# Altium PCB LEDMiniCube_PCB.PcbDoc (part 2 of 2)
Units mm, origin at the board's own origin, x right, y up, seen from the top; angles counter-clockwise.
Board outline 80 x 80 mm, 2 copper layers (Top Layer, Bottom Layer); 142 components, 145 nets, 574 pads, 515 vias.
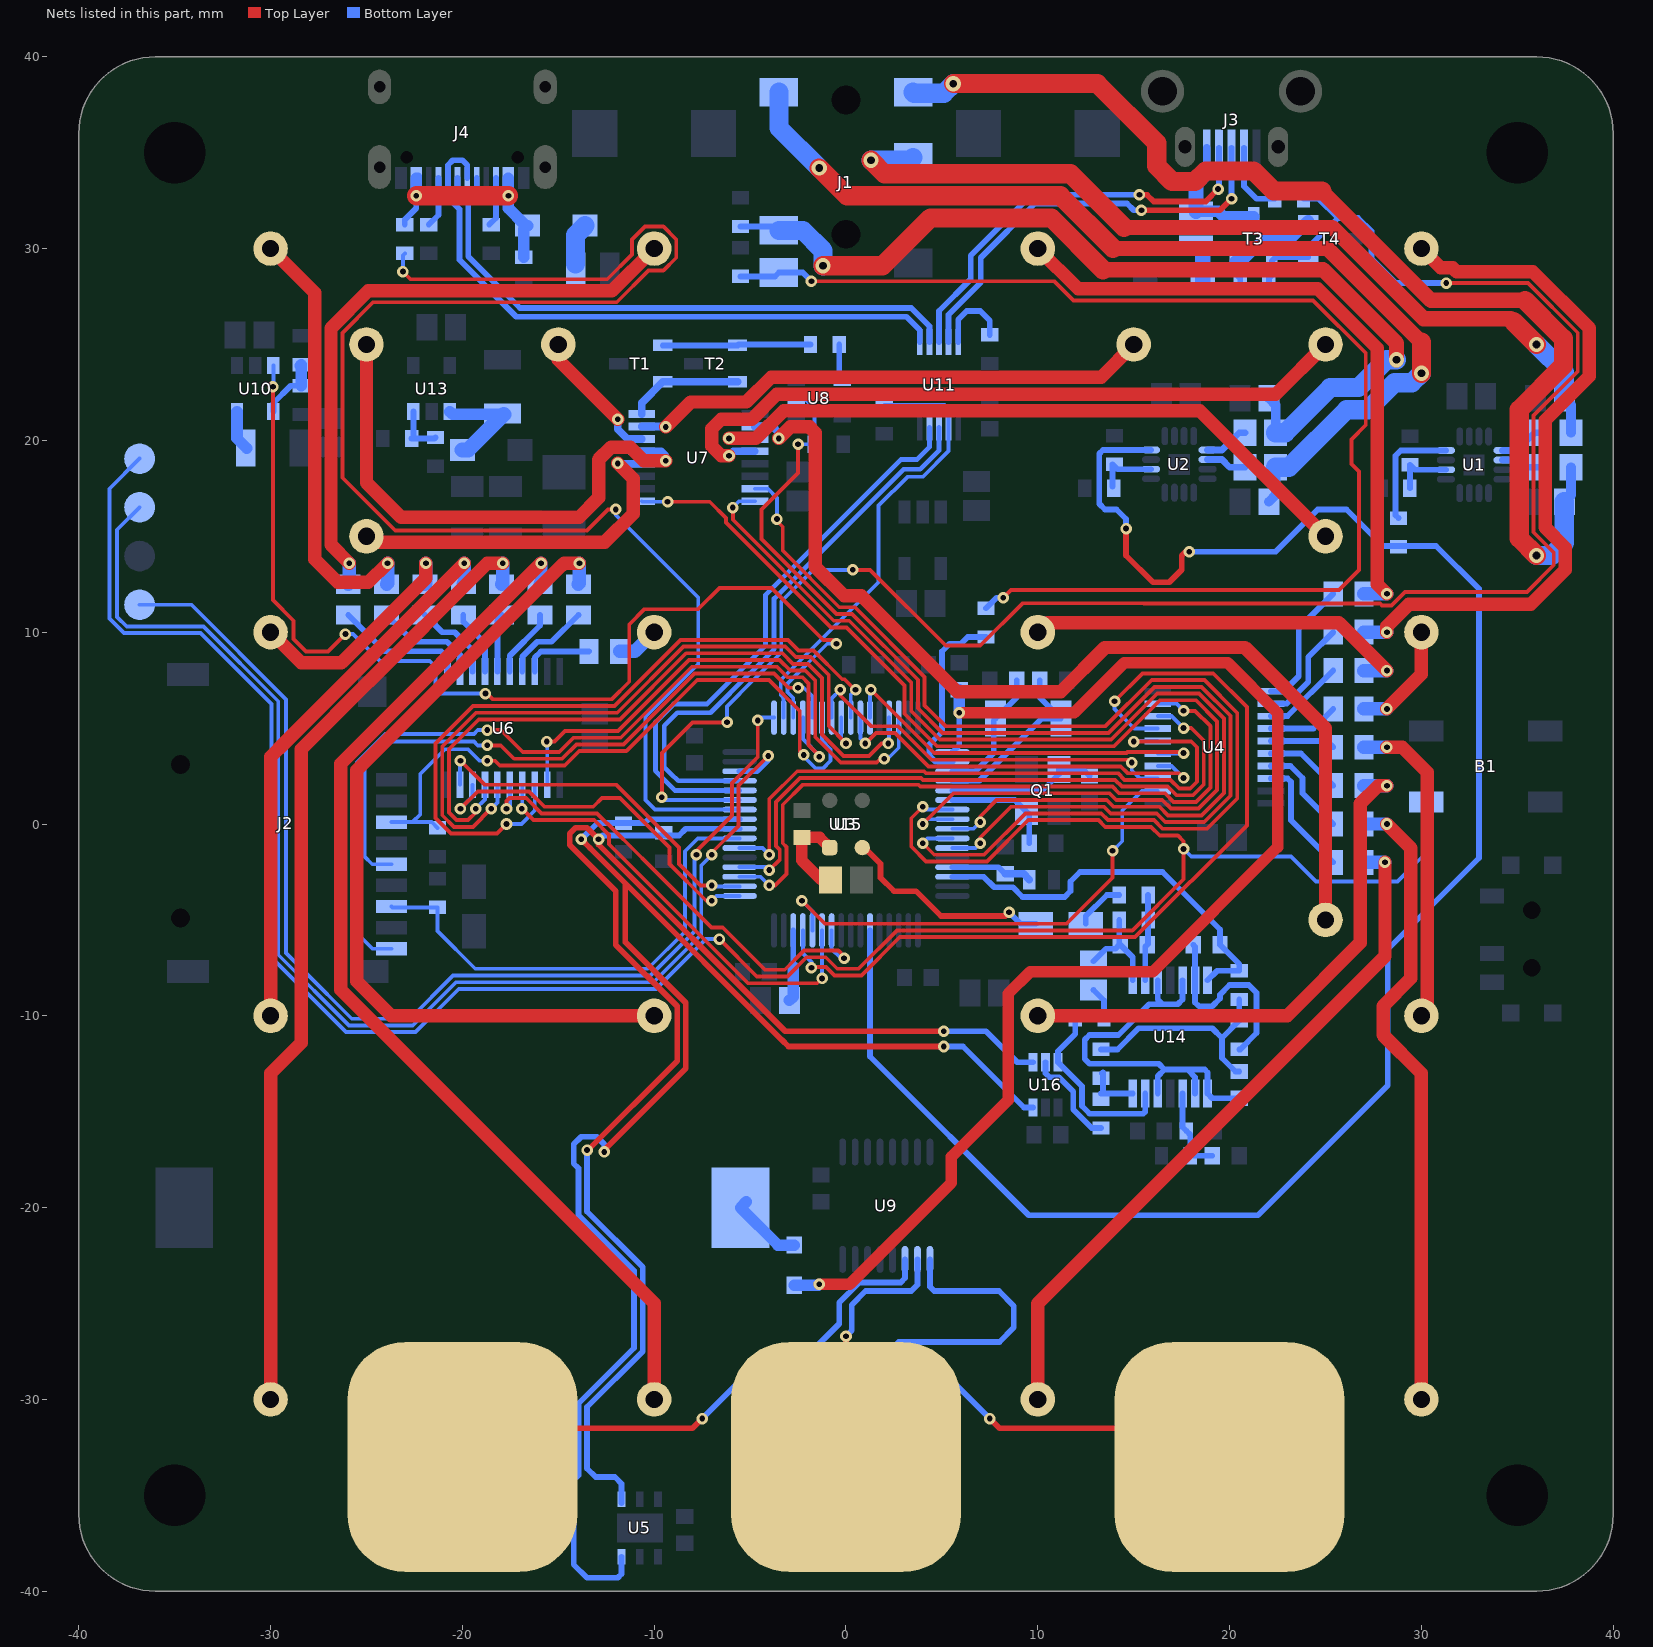
[diagram p2: the nets of this part, all layers, seen from the top]

## Via types
v1: diameter 0.6, hole 0.3, Top Layer to Bottom Layer, tented both sides, 496 vias
v2: diameter 0.8, hole 0.4, Top Layer to Bottom Layer, tented both sides, 17 vias
v3: diameter 0.6, hole 0.3, Top Layer to Bottom Layer, tented top, 2 vias

## Nets (pads, with @x,y where several pads share a name; then routed paths per layer and width w, separated by ;. In a path a pad name is that pad's centre, name@x,y a point inside that pad or via, vN(x,y) a via of type N, cw(c..) or ccw(c..) an arc to the next point about the centre after c; other vN are vias at no path point) (continued)
MAX_SD: R7.2 U2.4 U3.22 | length 99.4
  Top Layer w0.3: v1(14.6,15.4) 14.6,14 16,12.6 16.849,12.6 17.5,13.251 17.5,14 17.7,14.2 v1(17.9,14.2)
  Bottom Layer w0.3: U3.22@1.25,-5.55 1.25,-12.123 9.527,-20.4 21.473,-20.4 28.25,-13.623 28.25,-6.523 33,-1.773 33,12.264 30.764,14.5 28,14.5 26.1,16.4 24.6,16.4 22.4,14.2 v1(17.9,14.2) ; v1(14.6,15.4) 14.6,15.9 14.1,16.4 13.5,16.4 13.2,16.7 13.2,19.3 13.4,19.5 U2.4@15.9,19.5
Mic_Out: C44.2 R52.2 U3.14 U14.14 | length 20.9
  Bottom Layer w0.3: U3.14@5.55,-2.75 7.176,-2.75 7.726,-3.3 8.7,-3.3 9.2,-3.8 11.4,-3.8 11.7,-3.5 11.7,-3 12.2,-2.5 16.5,-2.5 19.5,-5.5 C44.2@19.5,-6.3 20.5,-7.3 R52.2@20.5,-7.65 19.35,-7.65 U14.14@18.85,-8.15
NetC7_1: C7.1 D1.2 U3.1 | length 67.9
  Top Layer w0.6: v1(-1.4,-24) 0.2,-24 5.5,-18.7 5.5,-17.349 8.45,-14.399 8.45,-8.85 9.6,-7.7 16,-7.7 22.5,-1.2 22.5,5.8 19.9,8.4 14.5,8.4 11.9,5.8 v1(5.9,5.8)
  Bottom Layer w0.3: U3.1@5.55,3.75 5.9,4.1 v1(5.9,5.8)
  Bottom Layer w0.6: D1.2@-2.7,-24.05 -1.45,-24.05 v1(-1.4,-24) ; v1(5.9,5.8) C7.1@5.9,7
NetC12_2: C12.2 L5.2 U3.13 | length 4.3
  Bottom Layer w0.3: U3.13@5.55,-2.25 7.95,-2.25 C12.2@8.3,-2.6
  Bottom Layer w0.4: C12.2@8.3,-2.6 9.26,-2.6 L5.2@9.56,-2.9
NetC16_1: C16.1 Q1.1 U3.5 | length 7.9
  Bottom Layer w0.3: U3.5@5.55,1.75 10.25,1.75 11.1,2.6 Q1.1@11.1,2.85 12.35,2.85 C16.1@12.7,2.5
NetC17_2: C17.2 Q1.3 U3.6 | length 5.8
  Bottom Layer w0.3: U3.6@5.55,1.25 8.8,1.25 Q1.3@9.4,0.65 9.55,0.5 C17.2@9.55,-1
NetC18_2: C18.2 U3.30 | length 3.7
  Bottom Layer w0.3: -2.75,-7.45 U3.30@-2.75,-5.55
  Bottom Layer w0.6: C18.2@-2.95,-9.2 -2.75,-9 -2.75,-7.45
NetC20_2: C20.2 U3.3 Y1.1 | length 6.8
  Bottom Layer w0.3: U3.3@5.55,2.75 6.75,2.75 7.7,3.7 7.7,5.4 Y1.1@7.8,5.5 8.9,6.6 C20.2@8.9,7.5
NetC21_2: C21.2 U3.4 Y1.2 | length 9.5
  Bottom Layer w0.3: U3.4@5.55,2.25 6.95,2.25 10.2,5.5 Y1.2@11.2,5.5 10.1,6.6 C21.2@10.1,7.5
NetC40_1: C40.1 R45.1 R47.2 U14.9 | length 4.5
  Bottom Layer w0.3: U14.9@15.6,-8.15 15.6,-6.4 15.75,-6.25 R45.1@15.75,-5 R47.2@15.75,-3.7
NetC40_2: C40.2 C43.1 R45.2 U14.8 | length 5.2
  Bottom Layer w0.3: C43.1@12.9,-7.15 13.55,-6.5 14.05,-6.5 C40.2@14.25,-6.3 ; R45.2@14.25,-5 C40.2@14.25,-6.3 ; U14.8@14.95,-8.15 14.95,-6.95 C40.2@14.3,-6.3 C40.2@14.25,-6.3
NetC41_1: C41.1 R48.2 R49.1 R52.1 | length 11.6
  Bottom Layer w0.3: R48.2@13.3,-11.75 14.15,-11.75 15.25,-10.65 19.1,-10.65 19.6,-11.15 ; C41.1@20.5,-12.9 20.3,-12.9 19.6,-12.2 19.6,-11.15 ; R52.1@20.5,-9.15 R49.1@20.5,-10.25 19.6,-11.15
NetC42_2: C42.2 R44.1 R46.2 U14.3 | length 4.6
  Bottom Layer w0.3: U14.3@17.55,-14.05 17.55,-15.8 R46.2@17.75,-16 17.95,-16.2 R44.1@17.95,-17.3 C42.2@19.1,-17.3
NetC43_2: C43.2 R50.1 | length 1.7
  Bottom Layer w0.3: C43.2@12.9,-8.65 13.45,-9.2 R50.1@13.45,-10.1
NetC44_1: C44.1 R49.2 U14.13 | length 10.4
  Bottom Layer w0.3: C44.1@18.1,-6.3 18.2,-6.4 U14.13@18.2,-8.15 18.2,-9.3 18.4,-9.5 19.1,-9.5 19.5,-9.1 19.5,-8.9 20,-8.4 21,-8.4 21.4,-8.8 21.4,-10.9 20.55,-11.75 R49.2@20.5,-11.75
NetC45_1: C45.1 R47.1 | length 2.6
  Bottom Layer w0.3: C45.1@12.5,-5.2 12.5,-4.8 13.6,-3.7 R47.1@14.25,-3.7
NetC45_2: C45.2 U15.4 | length 11.3
  Top Layer w0.3: U15.4@0.85,-1.23 0.955,-1.23 1.8,-2.075 1.8,-2.8 2.5,-3.5 3.649,-3.5 4.949,-4.8 8.3,-4.8 v1(8.5,-4.6)
  Bottom Layer w0.3: v1(8.5,-4.6) 9.1,-5.2 C45.2@9.9,-5.2
NetC47_2: C47.2 L10.1 U15.1 | length 5
  Top Layer w0.4: U15.1@-0.85,-1.23 U15.1@-0.85,-1.05
  Top Layer w0.6: U15.1@-0.85,-1.23 -1.38,-0.7 C47.2@-2.3,-0.7 -2.3,-1.9 -1.3,-2.9 L10.1@-0.8,-2.9
NetD1_1: D1.1 H1.1 | length 4
  Bottom Layer w0.6: H1.1@-5.2,-19.7 H1.1@-5.5,-20 -3.55,-21.95 D1.1@-2.7,-21.95
NetD2_1: D2.1 L7.2 | length 1.6
  Bottom Layer w0.8: D2.1@18.6,28.2 L7.2@18.6,29.8
NetD3_2: D3.2 L8.1 | length 2.2
  Bottom Layer w1: L8.1@-14.1,29.2 -14.1,30.7 D3.2@-13.6,31.2
NetD4_1: D4.1 L9.2 U13.1 | length 5.8
  Bottom Layer w0.6: U13.1@-20.65,21.5 -20.5,21.35 L9.2@-17.85,21.35
  Bottom Layer w0.8: D4.1@-20,19.5 -19.7,19.5 L9.2@-17.85,21.35
NetJ3_1: J3.1 L7.1 T3.3 | length 6.7
  Bottom Layer w0.4: 18.25,33.15 18.8,33.7 J3.1@18.8,35.25
  Bottom Layer w0.6: L7.1@18.25,31.94 19.4,31.94 19.69,31.65 T3.3@21.25,31.65
  Bottom Layer w0.8: L7.1@18.25,31.94 18.25,33.15
NetJ3_2: J3.2 U11.8 | length 22
  Top Layer w0.3: v1(15.3,32.8) 15.7,32.8 16.05,32.45 18.75,32.45 v1(19.4,33.1)
  Bottom Layer w0.3: U11.8@4.85,25.125 4.85,26.75 6.5,28.4 6.5,29.636 9.664,32.8 v1(15.3,32.8) ; v1(19.4,33.1) 19.45,33.15 J3.2@19.45,35.25
NetJ3_3: J3.3 U11.9 | length 22.4
  Top Layer w0.3: v1(15.4,32) 19.5,32 v1(20.1,32.6)
  Bottom Layer w0.3: U11.9@5.35,25.125 5.35,26.55 7.025,28.225 7.025,29.525 9.85,32.35 14.65,32.35 15,32 v1(15.4,32) ; v1(20.1,32.6) J3.3@20.1,35.25
NetJ3_4: J3.4 R34.1 | length 3.9
  Bottom Layer w0.3: J3.4@20.75,35.25 20.75,33.25 21.4,32.6 R34.1@22.35,32.6
NetJ4_A5: J4.A5 R39.1 | length 2.6
  Bottom Layer w0.3: R39.1@-21.75,31.25 -21.25,31.75 J4.A5@-21.25,33.675
NetJ4_A6: J4.A6 J4.B6 U11.7 | length 32.3
  Bottom Layer w0.3: J4.A6@-20.25,33.675 -20.25,32.85 -20,32.6 -19.7,32.6 ; J4.B6@-19.25,33.675 -19.25,32.75 -19.4,32.6 -19.7,32.6 ; U11.7@4.35,25.125 4.35,25.95 3.4,26.9 -17,26.9 -19.7,29.6 -19.7,32.6
NetJ4_A7: J4.A7 J4.B7 U11.6 | length 33.2
  Bottom Layer w0.3: J4.A7@-19.75,33.675 -19.75,34.35 -20,34.6 -20.5,34.6 -20.75,34.35 J4.B7@-20.75,33.675 -20.75,32.65 -20.15,32.05 -20.15,29.414 -17.186,26.45 3.15,26.45 3.85,25.75 U11.6@3.85,25.125
NetJ4_B5: J4.B5 R40.1 | length 2.6
  Bottom Layer w0.3: R40.1@-18.6,31.25 -18.25,31.6 J4.B5@-18.25,33.675
NetL1_1: L1.1 U1.9 | length 2.4
  Bottom Layer w0.35: U1.9@34.225,19.475 34.975,19.475 35.9,20.4 L1.1@36.2,20.4
NetL2_1: L2.1 U2.9 | length 2.3
  Bottom Layer w0.35: U2.9@18.85,19.5 19.6,19.5 20.5,20.4 L2.1@20.8,20.4
NetL3_1: L3.1 U1.10 | length 2.1
  Bottom Layer w0.35: U1.10@34.225,18.975 35.025,18.975 35.4,18.6 L3.1@36.2,18.6
NetL4_1: L4.1 U2.10 | length 2.1
  Bottom Layer w0.35: U2.10@18.85,19 19.6,19 20,18.6 L4.1@20.8,18.6
NetL6_1: L6.1 U10.5 | length 2.1
  Bottom Layer w0.6: U10.5@-31.75,21.5 -31.75,20.1 L6.1@-31.25,19.6
NetR3_1: R3.1 R4.1 U1.2 | length 3.2
  Bottom Layer w0.3: R3.1@29.4,17.5 R4.1@29.4,18.725 29.65,18.475 U1.2@31.275,18.475
NetR5_1: R5.1 R6.1 U2.2 | length 3.3
  Bottom Layer w0.3: R5.1@13.9,17.6 13.9,18.75 14.15,18.5 U2.2@15.9,18.5
NetR7_1: R7.1 U1.4 | length 6.1
  Bottom Layer w0.3: R7.1@28.8,15.95 28.65,16.1 28.65,19.199 28.926,19.475 U1.4@31.275,19.475
NetR8_1: R8.1 U4.18 | length 6.2
  Bottom Layer w0.3: U4.18@22.15,2.375 23.025,2.375 23.2,2.2 23.2,0.2 R8.1@25.4,-2
NetR9_1: R9.1 U4.17 | length 5
  Bottom Layer w0.3: U4.17@22.15,3.025 23.175,3.025 23.8,2.4 23.8,1.6 R9.1@25.4,0
NetR10_1: R10.1 U4.16 | length 3.9
  Bottom Layer w0.3: U4.16@22.15,3.675 23.725,3.675 R10.1@25.4,2
NetR11_1: R11.1 U4.15 | length 3.4
  Bottom Layer w0.3: U4.15@22.15,4.325 25.075,4.325 R11.1@25.4,4
NetR12_1: R12.1 U4.14 | length 3.7
  Bottom Layer w0.3: U4.14@22.15,4.975 24.375,4.975 R12.1@25.4,6
NetR13_1: R13.1 U4.13 | length 4.2
  Bottom Layer w0.3: U4.13@22.15,5.625 23.025,5.625 R13.1@25.4,8
NetR14_1: R14.1 U4.12 | length 5.6
  Bottom Layer w0.3: U4.12@22.15,6.275 22.975,6.275 24.1,7.4 24.1,8.7 R14.1@25.4,10
NetR15_1: R15.1 U4.11 | length 6.8
  Bottom Layer w0.3: U4.11@22.15,6.925 22.825,6.925 23.6,7.7 23.6,10.2 R15.1@25.4,12
NetR17_1: R17.1 U6.18 | length 3.7
  Bottom Layer w0.3: U6.18@-16.225,7.95 -16.225,8.675 -15.9,9 -15.888,8.988 -13.412,8.988 R17.1@-13.4,9
NetR18_1: R18.1 U6.17 | length 4.6
  Bottom Layer w0.3: U6.17@-16.875,7.95 -16.875,8.725 -16.1,9.5 -15.35,9.5 R18.1@-13.95,10.9
NetR20_1: R20.1 U6.16 | length 3.6
  Bottom Layer w0.3: U6.16@-17.525,7.95 -17.525,8.775 -15.95,10.35 R20.1@-15.95,10.9
NetR21_1: R21.1 U6.15 | length 3
  Bottom Layer w0.3: U6.15@-18.175,7.95 -18.175,10.675 R21.1@-17.95,10.9
NetR22_1: R22.1 U6.14 | length 3.4
  Bottom Layer w0.3: R22.1@-19.95,10.9 -19.95,10.55 -18.825,9.425 U6.14@-18.825,7.95
NetR23_2: R23.2 U3.42 | length 83.8
  Top Layer w0.2: v1(-23.1,28.8) -22.7,28.4 -12.449,28.4 -11.15,29.699 -11.15,30.476 -10.476,31.15 -9.524,31.15 -8.85,30.476 -8.85,29.524 -9.524,28.85 -10.301,28.85 -11.951,27.2 -24.651,27.2 -26.25,25.601 -26.25,18.05 -23.5,15.3 -13.5,15.3 -12.4,16.4 v1(-12,16.4)
  Bottom Layer w0.2: v1(-23.1,28.8) -23.1,29.65 R23.2@-23,29.75 ; v1(-12,16.4) -12,16.1 -7.7,11.8 -7.7,8.339 -10.45,5.589 -10.45,1.25 -9.95,0.75 U3.42@-5.55,0.75
NetR24_1: R24.1 U6.13 | length 4.4
  Bottom Layer w0.3: R24.1@-21.95,10.9 -21.05,10 -20.4,10 -19.475,9.075 U6.13@-19.475,7.95
NetR25_1: R25.1 U6.12 | length 5.6
  Bottom Layer w0.3: R25.1@-23.95,10.9 -22.55,9.5 -20.8,9.5 -20.125,8.825 U6.12@-20.125,7.95
NetR26_1: R26.1 U6.11 | length 6.8
  Bottom Layer w0.3: R26.1@-25.95,10.9 -24.05,9 -21.1,9 -20.775,8.675 U6.11@-20.775,7.95
NetR31_1: R31.1 T1.1 T2.1 | length 7.7
  Bottom Layer w0.3: T1.1@-9.55,24.95 T2.1@-5.65,24.95 -5.6,25 R31.1@-1.85,25
NetR31_2: R31.2 U8.4 | length 1.9
  Bottom Layer w0.3: R31.2@-0.35,25 -0.35,23.3 U8.4@-0.2,23.15
NetR32_2: R32.2 U3.2 | length 9.6
  Bottom Layer w0.3: U3.2@5.55,3.25 4.664,3.25 4.35,3.564 4.35,4.153 5,4.803 5,9 5.4,9.4 6,9.4 6.35,9.75 R32.2@7.3,9.75
NetR33_1: R33.1 T3.2 T4.2 | length 6
  Bottom Layer w0.3: T3.2@20.3,29.35 20.3,28.7 20.55,28.45 R33.1@20.55,28.1
  Bottom Layer w0.6: T3.2@20.3,29.35 20.65,29.35 21.7,30.4 23.05,30.4 T4.2@24.1,31.45
NetR36_1: R36.1 R37.2 U10.4 | length 3.4
  Bottom Layer w0.3: U10.4@-29.85,21.5 -29.85,21.95 -28.95,22.85 R36.1@-28.4,22.85
  Bottom Layer w0.6: R37.2@-28.45,23.9 R37.2@-28.4,23.95 R36.1@-28.4,22.85
NetR41_1: R41.1 R43.2 U13.3 | length 2.7
  Bottom Layer w0.3: U13.3@-22.55,21.5 -22.55,20.2 R43.2@-22.65,20.1 -21.45,20.1 R41.1@-21.4,20.15
NetR48_1: R48.1 R51.2 U14.7 | length 2.8
  Bottom Layer w0.3: R51.2@13.3,-14.05 R51.2@13.4,-14.05 ; R48.1@13.35,-13 13.4,-12.95 R51.2@13.4,-14.05 ; U14.7@14.95,-14.05 R51.2@13.4,-14.05
NetR50_2: R50.2 U14.6 U16.6 | length 9.9
  Bottom Layer w0.3: R50.2@11.95,-10.1 11.95,-10.95 11.05,-11.85 U16.6@11.05,-12.425 12.3,-13.675 12.3,-14.7 12.7,-15.1 15.5,-15.1 15.6,-15 U14.6@15.6,-14.05
NetR51_1: R51.1 U16.5 | length 5.2
  Bottom Layer w0.3: U16.5@10.4,-12.425 10.4,-13 10.6,-13.2 11.1,-13.2 11.85,-13.95 11.85,-14.886 12.814,-15.85 R51.1@13.3,-15.85
NetT1_2: T1.2 T2.2 U7.8 | length 6
  Bottom Layer w0.4: U7.8@-10.65,21.375 -10.65,21.95 T1.2@-9.55,23.05 T2.2@-5.65,23.05
Pad0: C22.2 pad.31 U9.1 | length 35.2
  Top Layer w0.3: v1(7.5,-31) 8,-31.5 14.5,-31.5 16,-33 pad.31@20,-33
  Bottom Layer w0.3: U9.1@4.375,-22.7 4.375,-24.125 4.6,-24.35 7.976,-24.35 8.75,-25.124 8.75,-26.25 8,-27 2.75,-27 2,-27.75 C22.2@2,-28.3 4.8,-28.3 v1(7.5,-31)
Pad1: C23.2 pad.30 U9.2 | length 14.8
  Top Layer w0.3: pad.30@0,-33 v1(0,-26.7)
  Bottom Layer w0.3: C23.2@0,-28.3 0,-27.5 v1(0,-26.7) 0.3,-26.4 0.3,-25.074 1.024,-24.35 3.4,-24.35 3.725,-24.025 U9.2@3.725,-22.7
Pad2: C24.2 pad.29 U9.3 | length 28.9
  Top Layer w0.3: pad.29@-20,-33 -16.5,-33 -15,-31.5 -8,-31.5 v1(-7.5,-31)
  Bottom Layer w0.3: v1(-7.5,-31) -4.8,-28.3 C24.2@-2,-28.3 -2,-27.7 -0.35,-26.05 -0.35,-24.95 0.7,-23.9 2.85,-23.9 3.075,-23.675 U9.3@3.075,-22.7
r0in: U3.26 U6.5 | length 25.5
  Top Layer w0.2: v1(-17.7,0.8) -17.7,1.2 -17.55,1.35 -16.672,1.35 -15.872,0.55 -12.977,0.55 -12.427,0 -12.408,0 -10.754,-1.654 -10.558,-1.85 -10.558,-1.856 -7.014,-5.4 -6.422,-5.4 -4.222,-7.6 -3.195,-7.6 -2.195,-6.6 -0.4,-6.6 -0.1,-6.9 v1(-0.1,-7)
  Bottom Layer w0.2: v1(-17.7,0.8) -17.525,0.975 U6.5@-17.525,2.05 ; U3.26@-0.75,-5.55 -0.75,-6.509 -0.259,-7 v1(-0.1,-7)
r0out: pad.1 R21.2 | length 50.2
  Top Layer w0.7: pad.1@-30,-30 -30,-13 -28.4,-11.4 -28.4,3.9 -24.9,7.4 -24.898,7.4 -19.05,13.248 -19.05,13.25 -18.7,13.6 v1(-17.9,13.6)
  Bottom Layer w0.7: R21.2@-17.95,12.5 -17.9,12.55 v1(-17.9,13.6)
r1in: U3.27 U6.4 | length 23.5
  Top Layer w0.2: v1(-16.9,0.8) -16.3,0.2 -13.122,0.2 -12.35,-0.572 -12.35,-1.054 -5.104,-8.3 -1.5,-8.3 v1(-1.25,-8.05)
  Bottom Layer w0.2: v1(-16.9,0.8) -16.875,0.825 U6.4@-16.875,2.05 ; v1@-1.25,-8 U3.27@-1.25,-5.55
r1out: pad.2 R20.2 | length 55.8
  Top Layer w0.7: v1(-15.9,13.6) -26.35,3.15 -26.35,-8.637 -10,-24.987 pad.2@-10,-30
  Bottom Layer w0.7: R20.2@-15.95,12.5 -15.9,12.55 v1(-15.9,13.6)
r2in: U3.28 U4.2 | length 25.5
  Top Layer w0.2: v1(-2.3,-4) -1.1,-5.2 11.5,-5.2 13.9,-2.8 v1(13.9,-1.4)
  Bottom Layer w0.2: v1(-2.3,-4) -1.75,-4.55 U3.28@-1.75,-5.55 ; v1(13.9,-1.4) 14.4,-0.9 14.4,0.7 15.425,1.725 U4.2@16.25,1.725
r2out: pad.3 R8.2 | length 36.6
  Top Layer w0.7: pad.3@10,-30 10,-25 28.1,-6.9 v1(28.1,-2)
  Bottom Layer w0.7: R8.2@27,-2 v1(28.1,-2)
r3in: U3.55 U4.3 | length 20.5
  Top Layer w0.2: v1(-0.3,7) -0.3,6.7 1.3,5.1 2.7,5.1 4.45,3.35 14.75,3.35 v1(14.9,3.2)
  Bottom Layer w0.2: U3.55@-0.75,5.55 -0.75,6.55 v1(-0.3,7) ; v1(14.9,3.2) 14.9,2.8 15.325,2.375 U4.3@16.25,2.375
r3out: pad.4 R9.2 | length 33.1
  Top Layer w0.7: v1(28.2,0) 29.45,-1.25 29.45,-8.05 28,-9.5 28,-11 30,-13 pad.4@30,-30
  Bottom Layer w0.7: R9.2@27,0 v1(28.2,0)
r4in: U3.56 U6.6 | length 36.5
  Top Layer w0.2: v1(-18.5,0.8) -19.45,-0.15 -20.445,-0.15 -21.05,0.455 -21.05,4.045 -19.295,5.8 -11.928,5.8 -8.478,9.25 -3.17,9.25 -2.62,8.7 -1.837,8.7 -0.9,7.763 -0.9,5.1 v1(0,4.2)
  Bottom Layer w0.2: v1(-18.5,0.8) -18.175,1.125 U6.6@-18.175,2.05 ; U3.56@-0.25,5.55 -0.25,4.45 v1(0,4.2)
r4out: pad.5 R22.2 | length 28.9
  Top Layer w0.7: pad.5@-30,-10 -30,3.5 -29.25,4.25 -29.25,4.252 v1(-19.9,13.6) v1(-19.9,13.6)
  Bottom Layer w0.7: R22.2@-19.95,12.5 -19.9,12.55 v1(-19.9,13.6)
r5in: U3.57 U6.3 | length 38
  Top Layer w0.2: v1(-17.7,0) -18.2,-0.5 -20.59,-0.5 -21.4,0.31 -21.4,4.2 -19.45,6.15 -12.073,6.15 -8.623,9.6 -3.025,9.6 -2.475,9.05 -1.692,9.05 -0.192,7.55 -0.072,7.55 0.478,7 v1(0.5,7)
  Bottom Layer w0.2: v1(-17.7,0) -16.922,0 -16.225,0.697 U6.3@-16.225,2.05 ; U3.57@0.25,5.55 0.25,6.75 v1(0.5,7)
r5out: pad.6 R18.2 | length 44.4
  Top Layer w0.7: v1(-13.9,13.6) -14.7,13.6 -15.05,13.25 -15.05,13.248 -25.5,2.798 -25.5,-8.2 -23.7,-10 pad.6@-10,-10
  Bottom Layer w0.7: R18.2@-13.95,12.5 -13.9,12.55 v1(-13.9,13.6)
r6in: U3.58 U4.4 | length 20.9
  Top Layer w0.2: v1(1,4.2) v1@1.022,4.2 ; v1@1.011,4.189 v1@1.022,4.2 ; v1(17.6,2.4) 17.35,2.65 14.672,2.65 14.322,3 4.305,3 2.555,4.75 1.572,4.75 v1@1.022,4.2
  Bottom Layer w0.2: U3.58@0.75,5.55 0.75,4.45 v1(1,4.2) ; U4.4@16.25,3.025 16.975,3.025 v1(17.6,2.4)
r6out: pad.7 R10.2 | length 28.6
  Top Layer w0.7: pad.7@10,-10 23,-10 26.8,-6.2 26.8,1.05 27.75,2 v1(28.2,2)
  Bottom Layer w0.7: R10.2@27,2 v1(28.2,2)
r7in: U3.59 U4.5 | length 20.5
  Top Layer w0.2: v1(1.3,7) 4.6,3.7 14.622,3.7 14.672,3.75 17.55,3.75 v1(17.6,3.7)
  Bottom Layer w0.2: U3.59@1.25,5.55 1.25,6.95 v1(1.3,7) ; U4.5@16.25,3.675 17.575,3.675 v1(17.6,3.7)
r7out: pad.8 R11.2 | length 16.7
  Top Layer w0.7: v1(28.2,4) 29,4 30.3,2.7 30.3,-9.7 pad.8@30,-10
  Bottom Layer w0.7: R11.2@27,4 v1(28.2,4)
r8in: U3.61 U6.7 | length 37.2
  Top Layer w0.2: v1(-19.3,0.8) -19.3,0.6 -19.7,0.2 -20.3,0.2 -20.7,0.6 -20.7,3.9 -19.15,5.45 -11.783,5.45 -8.333,8.9 -3.315,8.9 -2.765,8.35 -1.982,8.35 -1.25,7.618 -1.25,6.582 -1.25,4.672 -0.128,3.55 1.2,3.55 1.85,4.2 v1(2.2,4.2)
  Bottom Layer w0.2: v1(-19.3,0.8) -18.825,1.275 U6.7@-18.825,2.05 ; v1(2.2,4.2) 2.25,4.25 U3.61@2.25,5.55
r8out: pad.9 R24.2 | length 12.5
  Top Layer w0.7: pad.9@-30,10 -28.4,8.4 -26.304,8.4 -21.9,12.804 v1(-21.9,13.6)
  Bottom Layer w0.7: R24.2@-21.95,12.5 -21.9,12.55 v1(-21.9,13.6)
r9in: U3.62 U6.2 | length 28.2
  Top Layer w0.2: v1(-15.6,4.3) -15.2,4.3 -14.65,4.85 -11.888,4.85 -8.188,8.55 -3.46,8.55 -2.91,8 -2.127,8 -1.6,7.473 -1.6,6.727 -1.6,4.527 -0.273,3.2 1.6,3.2 1.8,3.4 v1(2,3.4)
  Bottom Layer w0.2: v1(-15.6,4.3) -15.575,4.275 U6.2@-15.575,2.05 ; v1(2,3.4) 2.178,3.4 2.75,3.972 U3.62@2.75,5.55
r9out: pad.10 R17.2 | length 2.2
  Bottom Layer w0.7: R17.2@-11.8,9 -11,9 pad.10@-10,10
r10in: U3.29 U4.7 | length 45.8
  Top Layer w0.2: v1(-1.8,-7.5) -1.75,-7.45 -1.05,-7.45 -0.6,-7.9 0.8,-7.9 2.8,-5.9 15.073,-5.9 20.9,-0.073 20.9,6.1 19.15,7.85 15.45,7.85 v1(14,6.4)
  Bottom Layer w0.2: U3.29@-2.25,-5.55 -2.25,-6.75 -1.8,-7.2 v1(-1.8,-7.5) ; v1(14,6.4) 14,6 15.025,4.975 U4.7@16.25,4.975
r10out: pad.11 R13.2 | length 20.6
  Top Layer w0.7: pad.11@10,10 10.5,10.5 25.7,10.5 v1(28.2,8)
  Bottom Layer w0.7: R13.2@27,8 v1(28.2,8)
r11in: U3.38 U4.6 | length 34.5
  Top Layer w0.2: v1(-4,-1.6) -4,1.295 -2.545,2.75 4.06,2.75 4.16,2.65 14.177,2.65 14.527,2.3 16.922,2.3 17.372,1.85 17.95,1.85 18.3,2.2 18.3,4 18,4.3 v1(15,4.3)
  Bottom Layer w0.2: U3.38@-5.55,-1.25 -4.35,-1.25 v1(-4,-1.6) ; v1(15,4.3) 15.025,4.325 U4.6@16.25,4.325
r11out: pad.12 R12.2 | length 5.9
  Top Layer w0.7: v1(28.2,6) 30,7.8 pad.12@30,10
  Bottom Layer w0.7: R12.2@27,6 v1(28.2,6)
r12in: U3.33 U6.8 | length 19.8
  Top Layer w0.2: v1(-20.1,0.8) -19.2,1.7 -16.527,1.7 -15.727,0.9 -13.178,0.9 -12.728,1.35 -11.777,1.35 -9.2,-1.227 -9.2,-2.083 -7.283,-4 v1(-7,-4)
  Bottom Layer w0.2: v1(-20.1,0.8) -19.475,1.425 U6.8@-19.475,2.05 ; v1(-7,-4) -6.75,-3.75 U3.33@-5.55,-3.75
r12out: pad.13 R25.2 | length 23
  Top Layer w0.7: pad.13@-30,30 -27.7,27.7 -27.7,13.8 -26.5,12.6 -24.9,12.6 v1(-23.9,13.6)
  Bottom Layer w0.7: R25.2@-23.95,12.5 -23.9,12.55 v1(-23.9,13.6)
r13in: U3.34 U6.9 | length 19
  Top Layer w0.2: v1(-20.1,3.3) -18.85,2.05 -11.982,2.05 -8.7,-1.232 -8.7,-2.088 -7.588,-3.2 v1(-7,-3.2)
  Bottom Layer w0.2: U6.9@-20.125,2.05 -20.125,3.275 v1(-20.1,3.3) ; v1(-7,-3.2) -6.95,-3.25 U3.34@-5.55,-3.25
r13out: pad.14 R26.2 | length 32.3
  Top Layer w0.7: v1(-25.9,13.6) -26.85,14.55 -26.85,25.85 -24.9,27.8 -12.2,27.8 pad.14@-10,30
  Bottom Layer w0.7: R26.2@-25.95,12.5 -25.9,12.55 v1(-25.9,13.6)
r14in: U3.35 U4.9 | length 36.6
  Top Layer w0.2: v1(-4,-3.2) -3.7,-3.2 -3.1,-2.6 -3.1,-1.2 -3.3,-1 -3.3,1 -2.25,2.05 3.77,2.05 3.87,1.95 13.887,1.95 14.237,1.6 16.632,1.6 17.082,1.15 18.24,1.15 19,1.91 19,5.1 18.2,5.9 v1(17.6,5.9) v1@17.6,6.1
  Bottom Layer w0.2: U3.35@-5.55,-2.75 -4.45,-2.75 v1(-4,-3.2) ; U4.9@16.25,6.275 17.225,6.275 v1(17.6,5.9)
r14out: pad.15 R15.2 | length 34.1
  Top Layer w0.7: pad.15@10,30 12.1,27.9 24.597,27.9 27.7,24.797 27.7,12.5 v1(28.2,12)
  Bottom Layer w0.7: R15.2@27,12 v1(28.2,12)
r15in: U3.36 U4.8 | length 34.1
  Top Layer w0.2: v1(-4,-2.4) -3.45,-1.85 -3.45,-1.35 -3.65,-1.15 -3.65,1.15 -2.4,2.4 3.915,2.4 4.015,2.3 14.032,2.3 14.382,1.95 16.777,1.95 17.227,1.5 18.095,1.5 18.65,2.055 18.65,4.35 18,5 v1(17.6,5)
  Bottom Layer w0.2: U3.36@-5.55,-2.25 -4.15,-2.25 v1(-4,-2.4) ; U4.8@16.25,5.625 16.975,5.625 v1(17.6,5)
r15out: pad.16 R14.2 | length 36.5
  Top Layer w0.7: v1(28.2,10) 28.2,10.3 29.35,11.45 29.882,11.45 35.699,11.45 37.5,13.251 37.5,14.409 36.45,15.459 36.45,21.041 38.75,23.341 38.75,25.859 35.809,28.8 31.831,28.8 31.631,29 31,29 pad.16@30,30
  Bottom Layer w0.7: R14.2@27,10 v1(28.2,10)
Ref: C41.2 U14.1 U14.2 U14.5 U14.10 U14.12 | length 21.7
  Bottom Layer w0.3: U14.5@16.25,-14.05 16.25,-13.15 16.6,-12.8 ; U14.10@16.25,-8.15 16.25,-9.15 16.5,-9.4 ; U14.12@17.55,-8.15 17.55,-9.15 17.3,-9.4 16.5,-9.4 ; U14.2@18.2,-14.05 18.2,-13.2 17.8,-12.8 ; C41.2@20.5,-14.3 19.1,-14.3 U14.1@18.85,-14.05 18.85,-12.95 18.7,-12.8 17.8,-12.8 ; 16.5,-9.4 15.8,-9.4 14.2,-11 12.7,-11 12.45,-11.25 12.45,-12.25 12.7,-12.5 16.3,-12.5 16.6,-12.8 ; 16.6,-12.8 17.8,-12.8
Reset: B1.1 pad.32 U3.7 | length 125.5
  Top Layer w0.2: v1(-6.6,-6) -4.65,-7.95 -3.05,-7.95 -2.05,-6.95 -1.055,-6.95 -0.455,-7.55 0.65,-7.55 2.65,-5.55 14.928,-5.55 17.6,-2.878 v1(17.6,-1.3) 17.6,-0.9 17.3,-0.6 16.357,-0.6 15.907,-0.15 13.512,-0.15 13.162,0.2 9.5,0.2 7.35,-1.95 4.172,-1.95 3.4,-1.178 3.4,0.3 v1(4,0.9)
  Bottom Layer w0.2: pad.32@-36.83,19.05 -38.4,17.48 -38.4,10.705 -37.645,9.95 -33.645,9.95 -29.95,6.255 -29.95,-6.959 -26.059,-10.85 -22.441,-10.85 -20.191,-8.6 -9.9,-8.6 -7.3,-6 v1(-6.6,-6) ; v1(4,0.9) 4.15,0.75 U3.7@5.55,0.75 ; v1(17.6,-1.3) 18,-1.7 23.2,-1.7 24.5,-3 28.75,-3 30.25,-1.5 B1.1@30.25,1.15
SCL: R19.1 U3.41 U5.6 U16.3 | length 85.7
  Top Layer w0.3: v1(-13.8,-0.8) -13.35,-1.25 -13.35,-1.256 -11.503,-3.103 ; v1(-12.6,-17.1) -12.6,-17 -8.35,-12.75 -8.35,-9.317 -11.503,-6.163 -11.503,-3.103 ; v1(5.1,-11.6) -3,-11.6 -3.35,-11.25 -3.356,-11.25 -11.503,-3.103
  Bottom Layer w0.3: v1(-13.8,-0.8) -12.95,0.05 R19.1@-11.6,0.05 -10.5,0.05 -10.3,0.25 U3.41@-5.55,0.25 ; v1(-12.6,-17.1) -12.6,-16.7 -13,-16.3 -13.8,-16.3 -14.2,-16.7 -14.2,-17.7 -13.95,-17.95 -13.95,-20.386 -11.05,-23.286 -11.05,-27.314 -13.95,-30.214 -13.95,-33.95 -14.2,-34.2 -14.2,-38.6 -13.5,-39.3 -11.9,-39.3 -11.7,-39.1 U5.6@-11.7,-38.2 ; v1(5.1,-11.6) 6.1,-11.6 9.275,-14.775 U16.3@9.75,-14.775
SDA: R30.1 U3.40 U5.1 U16.4 | length 80.1
  Top Layer w0.3: v1(-13.5,-17) -13.5,-17.051 -8.8,-12.351 -8.8,-9.503 -12,-6.303 -12,-3.5 -14.4,-1.1 -14.4,-0.5 -14.1,-0.2 -13.5,-0.2 v1(-12.9,-0.8) -12.9,-1.07 -3.17,-10.8 v1(5.1,-10.8)
  Bottom Layer w0.3: v1(-13.5,-17) -13.5,-20.2 -10.6,-23.1 -10.6,-27.5 -13.5,-30.4 -13.5,-33.6 -13.05,-34.05 -12.05,-34.05 -11.7,-34.4 U5.1@-11.7,-35.2 U5.1@-11.7,-35.4 ; v1(-12.9,-0.8) -12.7,-0.6 -8.7,-0.6 -8.35,-0.25 U3.40@-5.55,-0.25 ; v1(5.1,-10.8) 7.3,-10.8 8.925,-12.425 U16.4@9.75,-12.425
SDCard_Pow: U3.51 U10.3 | length 56.4
  Top Layer w0.2: v1(-29.876,22.8) -29.876,11.676 -28.8,10.6 -28.8,9.649 -28.151,9 -27,9 v1(-26.1,9.9) ; v1(-18.8,6.8) -18.7,6.8 -18.4,6.5 -12.218,6.5 -11.3,7.418 -11.3,10.4 -10.5,11.2 -7.7,11.2 -6.6,12.3 -3.889,12.3 -1.189,9.6 -0.7,9.6 v1(-0.5,9.4)
  Bottom Layer w0.2: v1(-29.876,22.8) -29.85,22.826 U10.3@-29.85,23.9 ; v1(-26.1,9.9) -25.7,9.9 -24.3,8.5 -21.7,8.5 -21.4,8.2 -21.4,7 -21.2,6.8 v1(-18.8,6.8) ; U3.51@-2.75,5.55 -2.75,6.572 -3.05,6.872 -3.05,7.328 -0.978,9.4 v1(-0.5,9.4)
SDIO_CD: J2.CD U3.52 | length 44.4
  Top Layer w0.2: v1(-18.7,4.9) -18,4.9 -16.85,3.75 -14.95,3.75 -14.2,4.5 -11.743,4.5 -8.043,8.2 -3.605,8.2 -3.055,7.65 -2.272,7.65 -1.95,7.328 -1.95,6.872 -1.95,4.128 -1.4,3.578 v1(-1.4,3.5)
  Bottom Layer w0.2: J2.CD@-23.7,-6.5 -24.7,-6.5 -25.5,-5.7 -25.5,3.2 -24,4.7 -19.4,4.7 -19.2,4.9 v1(-18.7,4.9) ; U3.52@-2.25,5.55 -2.25,4.428 -1.4,3.578 v1(-1.4,3.5)
SDIO_CK: J2.5 U3.53 | length 34
  Top Layer w0.2: v1(-18.7,4.1) -18,4.1 -17.3,3.4 -14.805,3.4 -14.055,4.15 -11.598,4.15 -7.898,7.85 -3.75,7.85 -3,7.1 v1(-2.5,7.1)
  Bottom Layer w0.2: J2.5@-23.7,-2.1 -24.7,-2.1 -25.1,-1.7 -25.1,3.1 -23.9,4.3 -19.4,4.3 -19.2,4.1 v1(-18.7,4.1) ; v1(-2.5,7.1) -2.2,7.1 -1.75,6.65 U3.53@-1.75,5.55
SDIO_CMD: J2.3 R16.1 U3.54 | length 35.1
  Top Layer w0.2: v1(-18.7,3.3) -18.3,3.3 -18.05,3.05 -14.66,3.05 -13.91,3.8 -11.453,3.8 -7.753,7.5 -4.014,7.5 -2.409,5.895 -2.409,3.809 v1(-2.2,3.6)
  Bottom Layer w0.2: J2.3@-23.7,0.1 -22.6,0.1 ; R16.1@-21.3,-0.2 -21.6,0.1 -22.6,0.1 ; v1(-18.7,3.3) -19.1,3.3 -19.7,3.9 -20.9,3.9 -22.2,2.6 -22.2,0.5 -22.6,0.1 ; v1(-2.2,3.6) -2.2,3.522 -1.578,2.9 -1.2,2.9 -0.8,3.3 -0.8,3.9 -1.25,4.35 U3.54@-1.25,5.55
SDIO_D0: J2.7 R27.2 U3.39 | length 25.5
  Bottom Layer w0.2: J2.7@-23.7,-4.3 -23.65,-4.35 R27.2@-21.3,-4.35 -21.3,-5.579 -19.329,-7.55 -10.335,-7.55 -8.4,-5.615 -8.4,-1.422 -7.728,-0.75 U3.39@-5.55,-0.75
SP_DETECT: J1.5 R2.2 R32.1 | length 66.5
  Top Layer w0.2: v1(-1.8,28.3) 10.851,28.3 11.851,27.3 24.348,27.3 27.1,24.548 27.1,20.8 26.35,20.05 26.35,18.772 26.75,18.372 26.75,13.245 25.705,12.2 15.834,12.2 15.829,12.205 8.605,12.205 v1(8.2,11.8)
  Bottom Layer w0.3: R2.2@-5.5,28.55 -3.7,28.55 J1.5@-3.5,28.75 -2.25,28.75 v1(-1.8,28.3) ; R32.1@7.3,11.25 7.85,11.8 v1(8.2,11.8)
SP_OUTL_N: C4.1 J1.2 L4.2 | length 53.2
  Top Layer w0.8: 13.926,30 25.113,30 30,25.113
  Top Layer w1: v2(-1.4,34.2) 0.05,32.75 11.176,32.75 13.926,30 ; v2(30,23.5) 30,25.113
  Bottom Layer w0.5: C4.1@22.05,16.8 22.4,17.15 L4.2@22.4,18.6
  Bottom Layer w1: J1.2@-3.5,38.15 -3.5,36.3 v2(-1.4,34.2) ; L4.2@22.4,18.6 23.1,18.6 26.1,21.6 27.2,21.6 28.6,23 29.5,23 v2(30,23.5)
SP_OUTL_P: C2.2 J1.4 L2.2 R1.2 | length 49.9
  Top Layer w0.8: 13.4,28.9 24.869,28.9 28.7,25.069 v2(28.7,24.2)
  Top Layer w1: v2(-1.2,29.1) 1.9,29.1 4.4,31.6 10.7,31.6 13.4,28.9
  Bottom Layer w0.3: R1.2@-5.5,31.15 -3.7,31.15 J1.4@-3.5,30.95
  Bottom Layer w0.5: C2.2@22.05,22.2 22.4,21.85 L2.2@22.4,20.4
  Bottom Layer w1: J1.4@-3.5,30.95 -2.25,30.95 -1.2,29.9 v2(-1.2,29.1) ; L2.2@22.4,20.4 22.9,20.4 25.25,22.75 26.724,22.75 28.174,24.2 v2(28.7,24.2)
SP_OUTR_N: C3.1 J1.1 L3.2 | length 59.2
  Top Layer w0.8: 24.8,33 30.5,27.3 35.4,27.3
  Top Layer w1: v2(5.6,38.6) 13.1,38.6 16.2,35.5 16.2,34.3 17,33.5 18.2,33.5 18.75,34.05 21.25,34.05 22.3,33 24.8,33 ; 35.4,27.3 37.4,25.3 37.4,23.9 35.1,21.6 35.1,14.9 v2(36,14)
  Bottom Layer w0.5: C3.1@37.45,16.8 37.8,17.15 L3.2@37.8,18.6
  Bottom Layer w1: J1.1@3.5,38.15 3.55,38.1 5.1,38.1 v2(5.6,38.6) ; v2(36,14) 36.8,14 37.45,14.65 C3.1@37.45,16.8
SP_OUTR_P: C1.2 J1.3 L1.2 | length 46.3
  Top Layer w0.8: 14.5,31.1 25.356,31.1 30.107,26.35 34.65,26.35 34.8,26.2
  Top Layer w1: v2(1.3,34.6) 2,33.9 11.7,33.9 14.5,31.1 ; 34.8,26.2 v2(36,25)
  Bottom Layer w0.5: C1.2@37.45,22.2 37.8,21.85 L1.2@37.8,20.4
  Bottom Layer w1: v2(1.3,34.6) 3.35,34.6 J1.3@3.5,34.75 ; v2(36,25) 37.45,23.55 C1.2@37.45,22.2
SWC: pad.35 U3.49 | length 60.8
  Top Layer w0.2: v1(-7.8,-1.6) -7.8,-1.4 -5.95,0.45 -5.95,2.145 -4.6,3.495 v1(-4.6,5.4)
  Bottom Layer w0.2: pad.35@-36.83,11.43 -34.13,11.43 -29.2,6.5 -29.2,-6.719 -28.26,-7.66 -25.769,-10.15 -22.731,-10.15 -20.481,-7.9 -10.19,-7.9 -7.9,-5.61 -7.9,-1.7 v1(-7.8,-1.6) ; v1(-4.6,5.4) -4.45,5.55 U3.49@-3.75,5.55
SWD: pad.33 U3.46 | length 68.1
  Top Layer w0.2: v1(-7,-1.6) -7,-1.5 -5.605,-0.105 -5.6,-0.105 -5.6,2 v1(-4.05,3.55) v1@-3.9,3.7
  Bottom Layer w0.2: pad.33@-36.83,16.51 -38,15.34 -38,10.8 -37.5,10.3 -33.5,10.3 -29.6,6.4 -29.6,-6.814 -25.914,-10.5 -22.586,-10.5 -20.336,-8.25 -10.045,-8.25 -7.55,-5.755 -7.55,-2.172 -7,-1.622 v1(-7,-1.6)
  Bottom Layer w0.3: U3.46@-5.55,2.75 -4.65,2.75 -4.05,3.35 v1(-4.05,3.55)
USB_D_N: U3.44 U11.4 | length 30.1
  Bottom Layer w0.25: U3.44@-5.55,1.75 -8.922,1.75 -9.9,2.728 -9.9,2.75 -9.925,2.775 -9.925,5.311 -8.986,6.25 -7.25,6.25 -5.175,8.325 -5.162,8.325 -4.825,8.662 -4.825,8.675 -4.2,9.3 -4.2,11.936 2.864,19 3.7,19 4.35,19.65 U11.4@4.35,20.675
USB_D_P: U3.45 U11.3 | length 29.4
  Bottom Layer w0.25: U3.45@-5.55,2.25 -8.75,2.25 -9.125,2.625 -9.138,2.625 -9.475,2.962 -9.475,5.125 -8.8,5.8 -7.064,5.8 -4.989,7.875 -4.975,7.875 -4.375,8.475 -4.375,8.489 -3.75,9.114 -3.75,11.75 3,18.5 3.872,18.5 4.85,19.478 U11.3@4.85,20.675
USB_En: R35.1 U11.10 | length 4
  Bottom Layer w0.3: U11.10@5.85,25.125 5.85,26.3 6.3,26.75 7,26.75 7.5,26.25 R35.1@7.5,25.5
USB_ID: R33.2 R34.2 T3.1 T4.1 U3.43 | length 99.9
  Top Layer w0.2: v1(-9.6,1.4) -9.6,3.7 -8,5.3 v1(-6.2,5.3) ; v1(0.35,13.25) 1.25,13.25 5.2,9.3 7,9.3 9.205,11.505 15.539,11.505 15.544,11.5 27.851,11.5 27.951,11.4 28.449,11.4 29.149,12.1 29.5,12.1 30.849,12.1 35.5,12.1 36.9,13.5 36.9,14.161 35.85,15.211 35.85,21.289 38.15,23.589 38.15,25.611 35.561,28.2 v1(31.3,28.2)
  Bottom Layer w0.2: v1(-9.6,1.4) -9.45,1.25 U3.43@-5.55,1.25 ; v1(-6.2,5.3) -6.2,6.133 -4.833,7.5 -4.82,7.5 -3.375,8.945 -3.375,11.595 -1.72,13.25 v1(0.35,13.25)
  Bottom Layer w0.3: R33.2@22.05,28.1 22.05,28.45 22.2,28.6 T3.1@22.2,29.35 22.4,29.55 T4.1@24.1,29.55 24.1,30.05 25.65,31.6 ; R34.2@23.85,32.6 24.65,32.6 25.65,31.6 ; v1(31.3,28.2) 28.667,28.2 27.4,29.467 27.4,30.9 26.7,31.6 25.65,31.6
USB_Sel: R38.2 U3.50 U11.2 | length 23.7
  Bottom Layer w0.2: U3.50@-3.25,5.55 -3.25,6.577 -3.4,6.727 -3.4,7.5 1.7,12.6 1.7,16.6 3.2,18.1 4.002,18.1 5.35,19.448 U11.2@5.35,20.675 5.35,21.65 5.15,21.85 R38.2@2,21.85
USB_TC_U: D3.1 J4.A4B9 J4.B4A9 R23.1 R42.2 | length 12.1
  Top Layer w1: v1(-22.4,32.75) v1(-17.6,32.75)
  Bottom Layer w0.3: R23.1@-23,31.25 -23,31.5 -22.4,32.1 v1(-22.4,32.75)
  Bottom Layer w0.4: J4.A4B9@-22.4,33.675 J4.A4B9@-22.3,33.775
  Bottom Layer w0.6: v1(-22.4,32.75) J4.A4B9@-22.4,33.675 ; J4.B4A9@-17.6,33.675 v1(-17.6,32.75) -17.6,32.1 D3.1@-16.8,31.3 ; R42.2@-16.8,29.55 -16.8,31 D3.1@-16.6,31.2
z0in: U3.8 U7.1 | length 59.7
  Top Layer w0.2: v1(-9.3,16.8) -7.1,16.8 -6.25,15.95 -6.25,15.717 -0.783,10.25 0.028,10.25 3.05,7.228 3.05,5.745 4.745,4.05 13.972,4.05 16.372,6.45 18.25,6.45 19.35,5.35 19.35,1.765 18.385,0.8 16.937,0.8 16.487,1.25 14.092,1.25 13.742,1.6 5.6,1.6 v1(4,0)
  Bottom Layer w0.2: U7.1@-10.65,16.825 -10.625,16.8 v1(-9.3,16.8) ; v1(4,0) 4.25,0.25 U3.8@5.55,0.25
z0out: pad.18 U7.4 | length 18.9
  Top Layer w0.7: pad.18@-25,15 -24.7,14.7 -12.569,14.7 -11.1,16.169 -11.1,18 v1(-11.9,18.8)
  Bottom Layer w0.4: v1(-11.9,18.8) -11.875,18.775 U7.4@-10.65,18.775
z1in: U3.9 U7.16 | length 54.3
  Top Layer w0.2: v1(-5.9,16.5) -5.9,15.862 -0.638,10.6 0.173,10.6 3.4,7.373 3.4,5.89 4.89,4.4 13.827,4.4 16.227,6.8 18.395,6.8 19.7,5.495 19.7,1.62 18.53,0.45 16.792,0.45 16.342,0.9 13.947,0.9 13.597,1.25 7.85,1.25 7,0.4 v1(7,0.1)
  Bottom Layer w0.2: v1(-5.9,16.5) -5.575,16.825 U7.16@-4.75,16.825 ; U3.9@5.55,-0.25 6.65,-0.25 v1(7,0.1)
z1out: pad.19 U7.5 | length 28.1
  Top Layer w0.7: pad.19@-25,25 -25,17.8 -23.2,16 -13.9,16 -12.9,17 -12.9,19.002 -12.252,19.65 -11.25,19.65 -10.541,18.941 v1(-9.4,18.941)
  Bottom Layer w0.4: U7.5@-10.65,19.425 -9.625,19.425 -9.425,19.225 -9.425,18.966 v1(-9.4,18.941)
z2in: U3.10 U7.15 | length 59.1
  Top Layer w0.2: v1(-3.6,15.9) -3.705,15.9 -3.3,15.495 -3.3,14.251 -0.349,11.3 0.463,11.3 4.1,7.663 4.1,6.18 4.34,5.94 5.18,5.1 13.537,5.1 15.937,7.5 18.685,7.5 20.4,5.785 20.4,1.33 18.82,-0.25 16.502,-0.25 16.052,0.2 13.657,0.2 13.307,0.55 9.35,0.55 7.2,-1.6 4.6,-1.6 v1(4,-1)
  Bottom Layer w0.2: U7.15@-4.75,17.475 -4.075,17.475 -3.6,17 v1(-3.6,15.9) ; v1(4,-1) 4.25,-0.75 U3.10@5.55,-0.75
z2out: pad.20 U7.6 | length 7.2
  Top Layer w0.7: pad.20@-15,25 -15,24.2 v1(-11.9,21.1)
  Bottom Layer w0.4: v1(-11.9,21.1) -11.9,20.58 -11.395,20.075 U7.6@-10.65,20.075
z3out: pad.21 U7.7 | length 27.4
  Top Layer w0.7: v1(-9.4,20.7) -8.1,22 -5.206,22 -3.906,23.3 13.3,23.3 pad.21@15,25
  Bottom Layer w0.4: U7.7@-10.65,20.725 -9.425,20.725 v1(-9.4,20.7)
z4out: pad.22 U7.12 | length 37.3
  Top Layer w0.7: v1(-6.1,19.2) -6.5,19.2 -7,19.7 -7,20.6 -6.5,21.1 -4.904,21.1 -3.604,22.4 22.4,22.4 pad.22@25,25
  Bottom Layer w0.4: v1(-6.1,19.2) -5.875,19.425 U7.12@-4.75,19.425
z5out: pad.23 U7.11 | length 35.8
  Top Layer w0.7: v1(-6.1,20.1) -4.702,20.1 -3.252,21.55 18.45,21.55 pad.23@25,15
  Bottom Layer w0.4: v1(-6.1,20.1) -6.075,20.075 U7.11@-4.75,20.075
z6out: pad.24 U7.10 | length 52.9
  Top Layer w0.7: v1(-3.5,20.1) -2.9,20.7 -1.9,20.7 -1.6,20.4 -1.6,13.4 -0.1,11.9 0.8,11.9 5.8,6.9 11.2,6.9 13.5,9.2 20.8,9.2 25,5 pad.24@25,-5
  Bottom Layer w0.4: U7.10@-4.75,20.725 -3.825,20.725 -3.5,20.4 v1(-3.5,20.1)
zPow: R28.1 U3.11 U8.2 | length 61.4
  Top Layer w0.2: v1(-2.5,19.8) -2.5,18.3 -4.4,16.4 -4.4,14.857 -0.493,10.95 0.318,10.95 3.75,7.518 3.75,6.035 5.035,4.75 13.682,4.75 16.082,7.15 18.54,7.15 20.05,5.64 20.05,1.475 18.675,0.1 16.647,0.1 16.197,0.55 13.802,0.55 13.452,0.9 8.6,0.9 7,-0.7 v1(7,-1)
  Bottom Layer w0.2: U8.2@-2.6,22.2 -2.2,22.2 -1.65,21.65 R28.1@-1.65,19.8 v1(-2.5,19.8) ; U3.11@5.55,-1.25 6.75,-1.25 v1(7,-1)
pads on no net: B1.2 J1.6 J1.8 J1.9 J2.1 J2.2 J2.8 J2.12 J2.13 J4.15 J4.16 J4.A8 J4.B8 S1.3 S1.8 S1.9 U3.24 U3.25 U3.37 U5.3 U5.4 U5.7 U7.9 U8.1 U9.4 U9.5 U9.7 U9.8 U9.9 U9.11 U9.12 U9.13 U12.4

## Polygon pours and split planes (outlines as drawn)
GND on Bottom Layer "Bottom_GND" (solid, remove dead copper, pour order 17): -30.5,-24 -40,-27.5 -40,40 40,40 40,-27.5 30.5,-24
5VUSB on Bottom Layer "Bottom_5VUSB_CS" (solid, remove dead copper, pour order 2): -11.25,28 -11.25,32.5 -10,33.75 -10,37.75 -14.75,37.75 -14.75,34.25 -12.75,32.25 -12.75,28
5VUSB on Bottom Layer "Bottom_5VUSB_RP" (solid, pour order 14): 28.435,28 27.1,29.335 27.1,31.7 27,31.8 25.8,31.8 25.6,31.6 25.6,29.4 24.2,28 17.25,28 17.25,29 17.25,34 13.5,37.75 11.75,37.75 11.75,33.1 13.991,33.1 14.25,32.841 14.25,32 11,28.75 11,23 9,21 6.372,21 2.547,17.176 7.426,17.176 12.75,22.5 12.75,24.75 14.25,26.25 15.75,26.25 17.25,24.75 17.25,22.75 19,22.75 19,24.5 20.25,25.75 30.75,25.75 32.5,24 32.5,22.75 34.25,22.75 34.25,24.5 30.75,28
NetJ3_1 on Bottom Layer "Bottom_USB2_P" (solid, pour order 8): 18.6,34.5 18.1,34 17.4,34 17.4,31 17.8,30.6 22.6,30.6 22.6,32.2 22.2,32.6 20.7,32.6 20.1,32 19,32 19,34.5
3VCC on Bottom Layer "Bottom_3VCC_MC" (solid, pour order 6): 3.5,6.9 3.9,7.3 3.9,8.891 2.6,10.191 2.6,10.8 3.7,10.8 4.7,9.8 4.7,6.9 4.7,1 4.1,0.4 4.1,-1.539 4.7,-2.139 4.7,-3.7 6.5,-3.7 6.8,-4 6.8,-6.3 7.3,-6.8 7.3,-8.5 7.1,-8.7 6.3,-8.7 6.1,-8.5 6.1,-7.8 5.1,-6.8 5.1,-6.7 4.2,-6.7 3.9,-6.4 3.9,-4.6 -3.75,-4.6 -3.75,-6.5 -4,-6.75 -4.5,-6.75 -5,-7.25 -5,-10 -7,-10 -7,-4.75 -6.25,-4 -4.976,-4 -4.5,-3.524 -4.5,3.8 -4.55,3.75 -5.55,3.75 -4.5,4.7 -1.2,4.7 -1.2,4.3 -3.3,2.2 -3.3,0.2 -2.7,-0.4 -2.6,-0.5 -1.1,-2 1.3,-2 2.8,-0.5 2.8,2.4 3.5,3.1
5VUSB on Bottom Layer "Bottom_5VUSB_LP" (solid, pour order 12): -28.5,29.8 -29.8,28.5 -31.4,28.5 -33.2,26.7 -33.2,24 -32.7,23.5 -31.1,23.5 -30.8,23.8 -30.8,26.4 -30.1,27.1 -28.8,27.1 -27.65,28.25 -26,28.25 -24.75,27 -21.4,27 -21,26.6 -21,23 -16.7,23 -16.7,24.45 -20.5,28.25 -23.25,28.25 -26.5,31.5 -26.5,32.3 -28.5,32.3
5VCC on Bottom Layer "Bottom_5VCC" (solid, remove dead copper, pour order 4): -12.4,16.1 -12.4,17.8 -15.1,20.5 -17.9,20.5 -17.9,18.1 -19.8,18.1 -20.7,19 -22.3,19 -22.3,17.9 -20.9,16.5 -15.2,16.5 -10.1,11.4 -10.1,8.5 -10.4,8.2 -12.6,8.2 -13.7,7.1 -15.2,7.1 -15.2,6.57 -13.83,5.2 -12,5.2 -11.9,5.1 -11.9,2.7 -12.5,2.1 -13.4,2.1 -15.5,0 -15.5,-1.2 -13.9,-2.8 -12.9,-2.8 -12.1,-3.6 -12.1,-6.4 -11.2,-7.3 -10.3,-7.3 -9,-6 -9,-5.2 -13.1,-1.1 -13.1,-0.4 -12.3,0.4 -10.9,0.4 -10.6,0.7 -10.6,4 -7.5,7.1 -7.5,11.2
GND on Top Layer "Top_GND" (solid, remove dead copper, pour order 18): -30.5,-24 -40,-27.5 -40,-24 -40,40 40,40 40,-24 40,-27.5 30.51,-24
5VUSB on Top Layer "Top_5VUSB_Br" (solid, pour order 10): -14.25,35.75 -13,34.5 -13,33.1 -12.3,32.4 -4.35,32.4 -2.25,34.5 11.75,34.5 13.15,33.1 15.75,33.1 15.75,36.5 15.2,36.5 12.95,38.75 -9.25,38.75 -10.75,37.25 -26,37.25 -28.25,35 -28.25,31 -26.77,31 -26.75,31.02 -26.75,34.5 -25.5,35.75
5VCC on Top Layer "Top_5VUSB_LP" (solid, pour order 16): -10.9,-6.6 -4,-13.5 6.5,-13.5 7,-13 7,-7.5 7.5,-7 8,-7.5 16,-7.5 22.5,-1 22.5,-0.5 21.8,0.2 20.9,0.2 14.7,-6 5,-6 4,-7 4,-10.6 3,-11.6 -3,-11.6 -10.9,-3.7
no net on Bottom Overlay "Battery Overlay" (solid, pour order 2): -31,-12 -31,-28 -11,-28 -9,-26 -9,-12

## Keep-outs
Keep-Out Layer:
  lines w0.1: -40,-36 ccw(c-36,-36) -36,-40 36,-40 ccw(c36,-36) 40,-36 40,36 ccw(c36,36) 36,40 -36,40 ccw(c-36,36) -40,36 -40,-36 ; -28,-38 ccw(c-27.5,-38) -27,-38 -27,-28.5 ccw(c-27.5,-28.5) -28,-28.5 -28,-38 ; -25.5,-26 cw(c-25.5,-25.5) -25.5,-25 -12.5,-25 cw(c-12.5,-25.5) -12.5,-26 -25.5,-26 ; -13.5,-38 ccw(c-13,-38) -12.5,-38 -12.5,-35 ccw(c-13,-35) -13.5,-35 -13.5,-38 ; -12.5,-33.5 cw(c-12.5,-33) -12.5,-32.5 -7.5,-32.5 cw(c-7.5,-33) -7.5,-33.5 -12.5,-33.5 ; -7.5,-38 ccw(c-7,-38) -6.5,-38 -6.5,-35 ccw(c-7,-35) -7.5,-35 -7.5,-38 ; -7.5,-26 cw(c-7.5,-25.5) -7.5,-25 -1.5,-25 cw(c-1.5,-25.5) -1.5,-26 -7.5,-26 ; 1.5,-26 cw(c1.5,-25.5) 1.5,-25 7.5,-25 cw(c7.5,-25.5) 7.5,-26 1.5,-26 ; 6.5,-38 ccw(c7,-38) 7.5,-38 7.5,-35 ccw(c7,-35) 6.5,-35 6.5,-38 ; 7.5,-33.5 cw(c7.5,-33) 7.5,-32.5 12.5,-32.5 cw(c12.5,-33) 12.5,-33.5 7.5,-33.5 ; 12.5,-38 ccw(c13,-38) 13.5,-38 13.5,-35 ccw(c13,-35) 12.5,-35 12.5,-38 ; 12.5,-26 cw(c12.5,-25.5) 12.5,-25 25.5,-25 cw(c25.5,-25.5) 25.5,-26 12.5,-26 ; 27,-38 ccw(c27.5,-38) 28,-38 28,-28.5 ccw(c27.5,-28.5) 27,-28.5 27,-38

## Other copper
Top Layer:
  pour cut-out: 0.1,-2.05 -0.1,-2.05 -0.1,-3.75 0.1,-3.75
Bottom Layer:
  pour cut-out: -30.7,20.7 -29.1,20.7 -29.1,18.5 -30.7,18.5
  pour cut-out: -16.8,23.6 -16.8,22 -19,22 -19,23.6

## Silkscreen, mask and mechanical layers (free items; w line width, h text height)
Top Overlay:
  lines w1: -25.5,-36 ccw(c-23,-36) -23,-38.5 -17,-38.5 ccw(c-17,-36) -14.5,-36 -14.5,-30 ccw(c-17,-30) -17,-27.5 -23,-27.5 ccw(c-23,-30) -25.5,-30 -25.5,-36 ; -5.5,-36 ccw(c-3,-36) -3,-38.5 3,-38.5 ccw(c3,-36) 5.5,-36 5.5,-30 ccw(c3,-30) 3,-27.5 -3,-27.5 ccw(c-3,-30) -5.5,-30 -5.5,-36 ; 14.5,-36 ccw(c17,-36) 17,-38.5 23,-38.5 ccw(c23,-36) 25.5,-36 25.5,-30 ccw(c23,-30) 23,-27.5 17,-27.5 ccw(c17,-30) 14.5,-30 14.5,-36
Bottom Overlay:
  drawing of 18 lines, arcs and shapes, not listed
  text "RES" at -31.75,16.51 h2
  text "SWD" at -31.75,14.605 h2
  text "GND" at -31.75,12.7 h2
  text "SWC" at -31.75,10.795 h2
  text "*" at -36.525,8.636 h2
  text "Reset" at 35.75,6.5 h2
  text "ROM" at 38,-4.5 h2 r270
  text "USB" at 38,-11 h2 r270
  text "ver. 3" at 33.625,-20.85 h2